# Altium PCB Y.PcbDoc
Units mm, origin at the board's own origin, x right, y up, seen from the top; angles counter-clockwise.
Board outline 59 x 15 mm, 2 copper layers (Top Layer, Bottom Layer); 8 components, 14 nets, 31 pads, 0 vias.
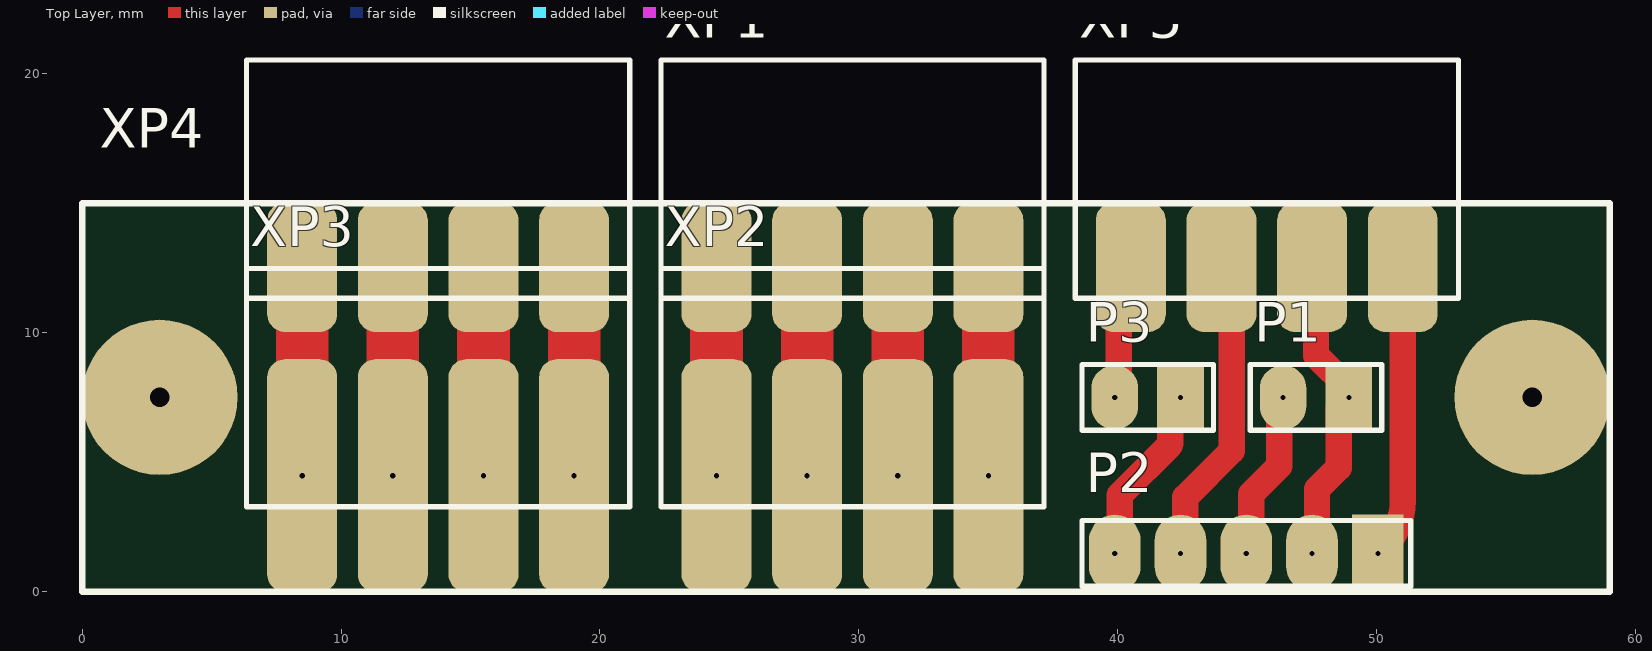
[diagram p0: Top Layer view]
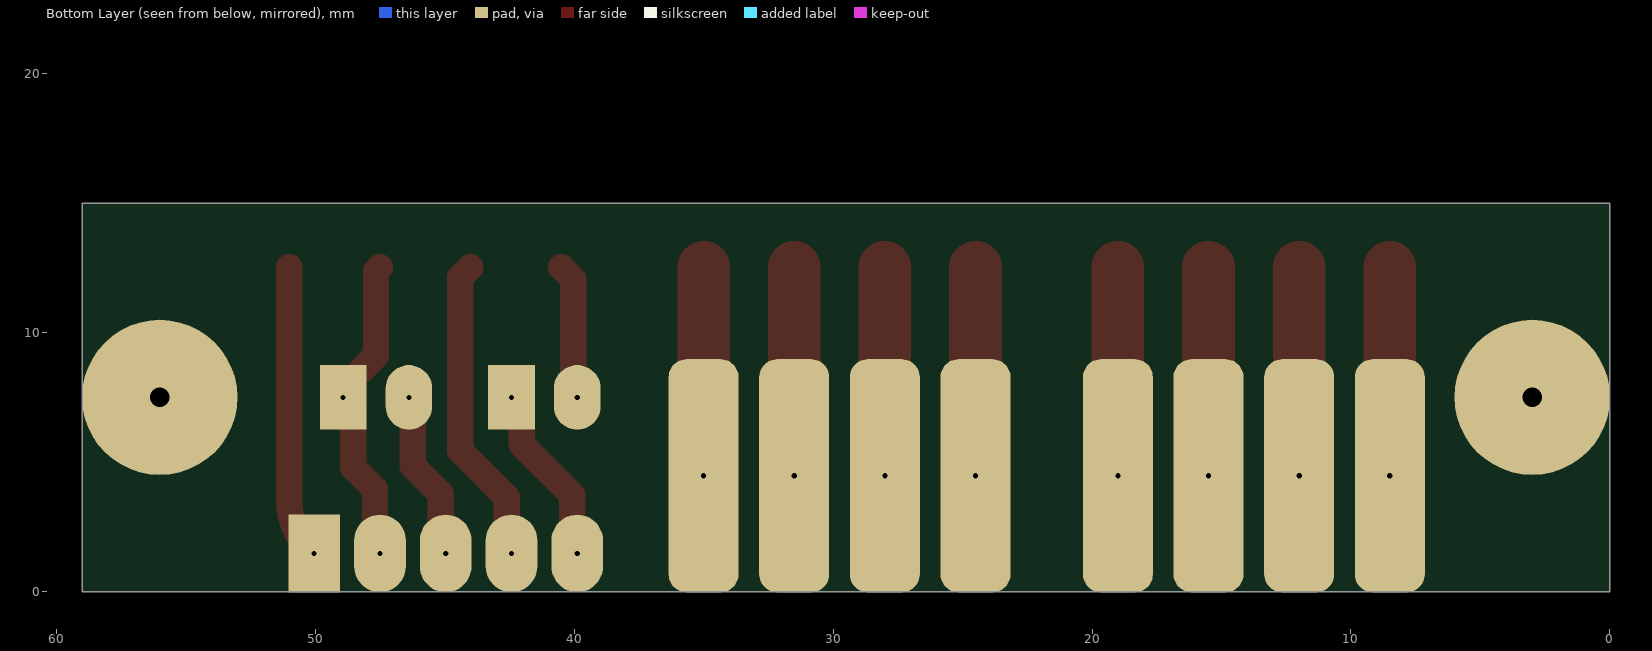
[diagram p1: Bottom Layer view, seen from below]
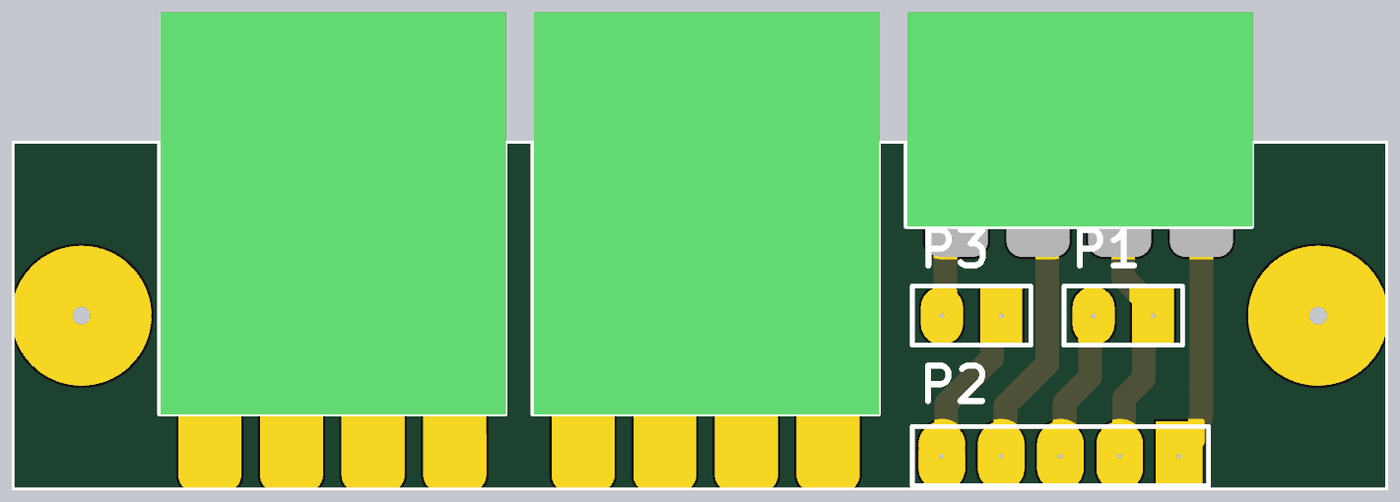
[diagram p2: 3D render of the assembled board from above, using the file's embedded part models]

## Layer stack, top to bottom
Top Solder: solder mask 0.0102, Solder Resist, Dk 3.5
Top Layer: signal copper 0.0356
Dielectric 1: dielectric 0.32, FR-4, Dk 4.8
Bottom Layer: signal copper 0.0356
Bottom Solder: solder mask 0.0102, Solder Resist, Dk 3.5

## Board outline
0,0 0,15 59,15 59,0

## Design rules (kind name [scope] priority, off if disabled: settings)
Clearance [All] p1: gap=0.254 ignorepadtopadclearanceinfootprint=FALSE except(0: Arc-Hole Track-Hole SMDPad-Hole THPad-Hole Via-Hole Fill-Hole Poly-Hole Region-Hole Text-Hole)
PolygonConnect [All] p1: connectstyle=Relief reliefconductorwidth=0.254 reliefentries=4 polygonreliefangle="90 Angle" airgapwidth=0.254
RoutingVias [All] p1: holewidth=0.711 width=1.27 viastyle="Through Hole" minholewidth=0.711 minwidth=1.27 maxholewidth=0.711 maxwidth=1.27
SolderMaskExpansion [All] p1: expansion=0.102
Width [All] p1: maxlimit=500 minlimit=0.254 preferedwidth=0.254 minimp=50.000000 maximp=50.000000 favimp=50.000000
30 further rules are at their usual default settings.

## Components (designator, comment, footprint, x,y, rotation, side; value= is the part's Value field where it differs from the comment)
P1 "Header 2" HDR1X2 48.919,7.5 r180 top
P2 "Header 5" HDR1X5 50.038,1.475 r180 top
P3 "Header 2" HDR1X2 42.418,7.5 r180 top
XP1 "15EDGRC-3.5-04P" RR_CONN_15EDGRC-3.5-04P#1 35,12.525 r180 top value="Pluggable terminal block; 3.5mm; ways:4; angled 90°; socket; male"
XP2 "15EDGRC-3.5-04P" RR_CONN_15EDGRC-3.5-04P#2 35,4.475 r180 top value="Pluggable terminal block; 3.5mm; ways:4; angled 90°; socket; male"
XP3 "15EDGRC-3.5-04P" RR_CONN_15EDGRC-3.5-04P#2 19,4.475 r180 top value="Pluggable terminal block; 3.5mm; ways:4; angled 90°; socket; male"
XP4 "15EDGRC-3.5-04P" RR_CONN_15EDGRC-3.5-04P#1 19,12.525 r180 top value="Pluggable terminal block; 3.5mm; ways:4; angled 90°; socket; male"
XP5 "15EDGRC-3.5-04P" RR_CONN_15EDGRC-3.5-04P#1 51,12.525 r180 top value="Pluggable terminal block; 3.5mm; ways:4; angled 90°; socket; male"

## Footprints (in the part's own frame and the unit in brackets; to place one, negate y for a bottom-side part, rotate by r counter-clockwise, add the part's x,y. Pads: shape width x height; smd on the part's side, far side on the other; paste and mask are expansions set on the pad)
HDR1X2 [mm] "Connector; Header; 2 Position"
  rect 1.8x2.5 hole 0.2: 1(0,0)
  oval 1.8x2.5 hole 0.2: 2(2.54,0)
  silkscreen extent -1.27,-1.27 3.81,1.27
HDR1X5 [mm] "Connector; Header; 5 Position"
  rect 2x3 hole 0.2: 1(0,0)
  oval 2x3 hole 0.2: 2(2.54,0) 3(5.08,0) 4(7.62,0) 5(10.16,0)
  silkscreen extent -1.27,-1.27 11.43,1.27
RR_CONN_15EDGRC-3.5-04P#1 [mm]
  rrect50% 2.7x5 smd: 1(0,0) 2(3.5,0) 3(7,0) 4(10.5,0)
  silkscreen extent -2.15,-8 12.65,1.2, body extent -2.2,-8 12.6,1.2, height 7.25
RR_CONN_15EDGRC-3.5-04P#2 [mm]
  rrect50% 2.7x9 hole 0.2: 1(0,0) 2(3.5,0) 3(7,0) 4(10.5,0)
  silkscreen extent -2.15,-8 12.65,1.2, body extent -2.2,-8 12.6,1.2, height 7.25

## Part data
P1 P3: "Header, 2-Pin", LatestRevisionDate=17-Jul-2002, LatestRevisionNote="Re-released for DXP Platform.", Publisher="Altium Limited"
P2: "Header, 5-Pin", LatestRevisionDate=17-Jul-2002, LatestRevisionNote="Re-released for DXP Platform.", Publisher="Altium Limited"
XP1 XP2 XP3 XP4 XP5: "CONN 15EDGRC-3.5-04P R-HEADER", Manufacturer="DEGSON ELECTRONICS", Package="4x3.5MM pitch", Cost=0,32, Order Number=15EDGRC-3.5-04P-14-00A(H)

## Free pads (board coordinates)
  round 6 hole 0.762: 1(3,7.5) 1(56,7.5)

## Nets (pads, with @x,y where several pads share a name; then routed paths per layer and width w, separated by ;. In a path a pad name is that pad's centre, name@x,y a point inside that pad or via, vN(x,y) a via of type N, cw(c..) or ccw(c..) an arc to the next point about the centre after c; other vN are vias at no path point)
12V: P1.1 P2.2 XP5.2 | length 12.2
  Top Layer w1.016: P2.2 47.686,1.663 47.686,3.947 48.527,4.788 48.527,7.108 P1.1 48.919,7.85 47.65,9.119 47.65,12.375 XP5.2
GND: P2.1 XP5.1 | length 11.3
  Top Layer w1.016: P2.1 50.256,1.693 ccw(c48.46,3.489) 51,3.489 XP5.1
NetP1_2: P1.2 P2.3 | length 6.6
  Top Layer w1.016: P2.3 45.146,1.663 45.146,3.77 46.229,4.852 46.229,7.35 P1.2
NetP2_4: P2.4 XP5.3 | length 12
  Top Layer w1.016: P2.4 42.606,1.663 42.606,3.643 44.399,5.436 44.399,12.126 XP5.3
NetP2_5: P2.5 P3.1 | length 7.1
  Top Layer w1.016: P2.5 40.066,1.663 40.066,3.719 42.012,5.664 42.012,5.715 42.026,5.729 42.026,7.108 P3.1
NetP3_2: P3.2 XP5.4 | length 5.3
  Top Layer w1.016: P3.2 40.028,7.65 40.028,12.053 XP5.4
NetXP1_1: XP1.1 XP2.1 | length 8.1
  Top Layer w2.032: XP2.1 XP1.1
NetXP1_2: XP1.2 XP2.2 | length 8.1
  Top Layer w2.032: XP2.2 XP1.2
NetXP1_3: XP1.3 XP2.3 | length 8.1
  Top Layer w2.032: XP2.3 XP1.3
NetXP1_4: XP1.4 XP2.4 | length 8.1
  Top Layer w2.032: XP2.4 XP1.4
NetXP3_1: XP3.1 XP4.1 | length 8.1
  Top Layer w2.032: XP3.1 XP4.1
NetXP3_2: XP3.2 XP4.2 | length 8.1
  Top Layer w2.032: XP3.2 XP4.2
NetXP3_3: XP3.3 XP4.3 | length 8.1
  Top Layer w2.032: XP3.3 XP4.3
NetXP3_4: XP3.4 XP4.4 | length 8.1
  Top Layer w2.032: XP3.4 XP4.4

## Silkscreen, mask and mechanical layers (free items; w line width, h text height)
Top Overlay:
  the board outline again, w0.254